# Altium PCB 5mm-6DUT-ECAL.PcbDoc (part 1 of 2)
Units mm, origin at the board's own origin, x right, y up, seen from the top; angles counter-clockwise.
Board outline 62 x 119 mm, 4 copper layers (Top Layer, Mid-Layer 1, Mid-Layer 2, Bottom Layer), stack 1.105 mm thick; 68 components, 63 nets, 769 pads, 1024 vias.
Unrouted connection lines stored in the file: 1.
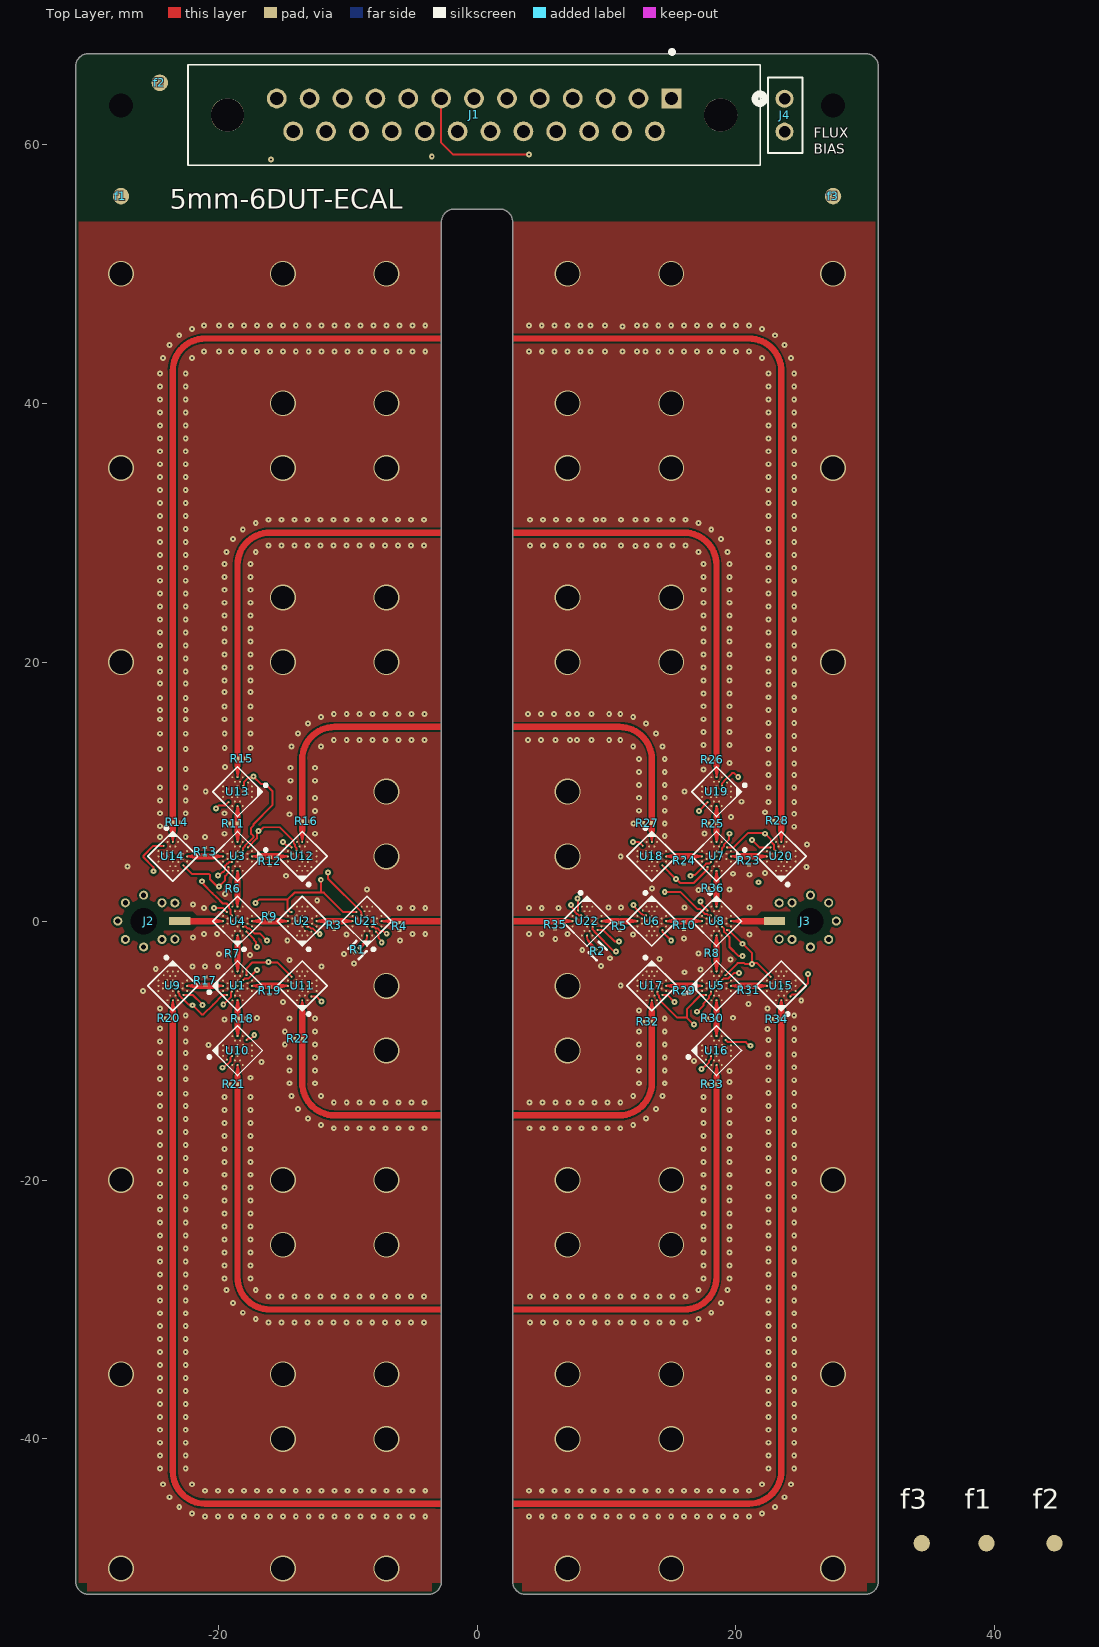
[diagram p0: Top Layer view]
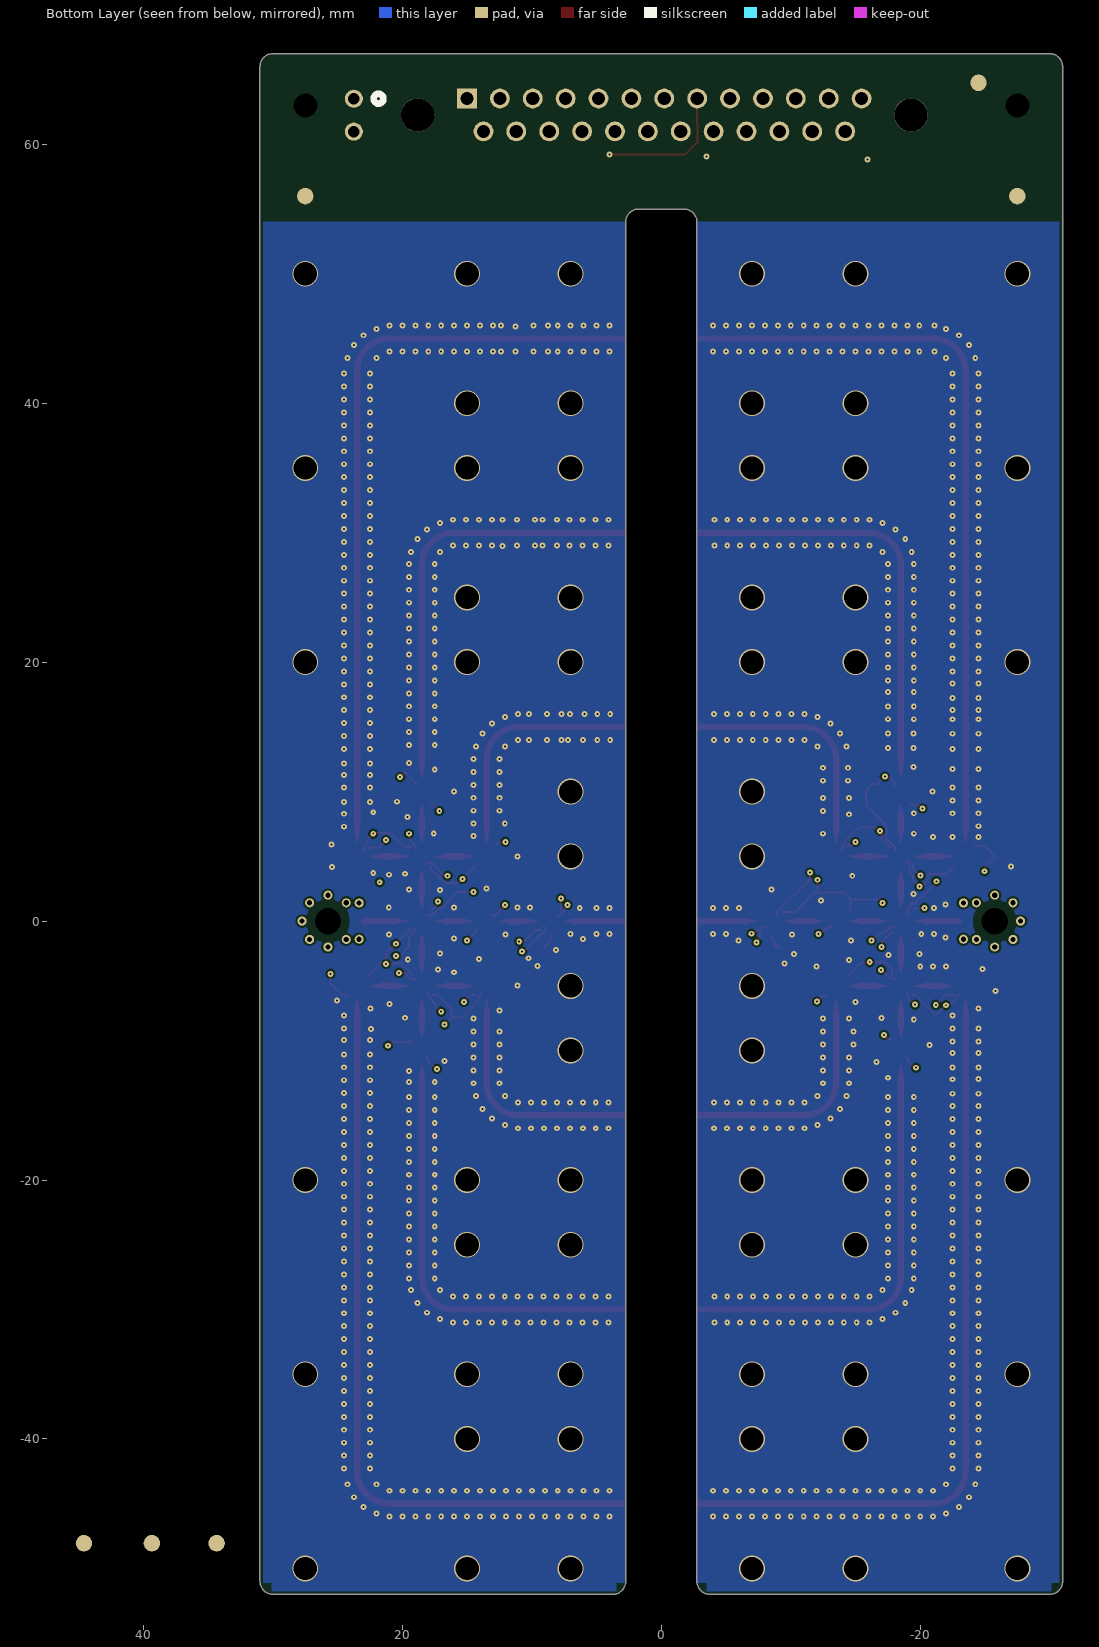
[diagram p1: Bottom Layer view, seen from below]
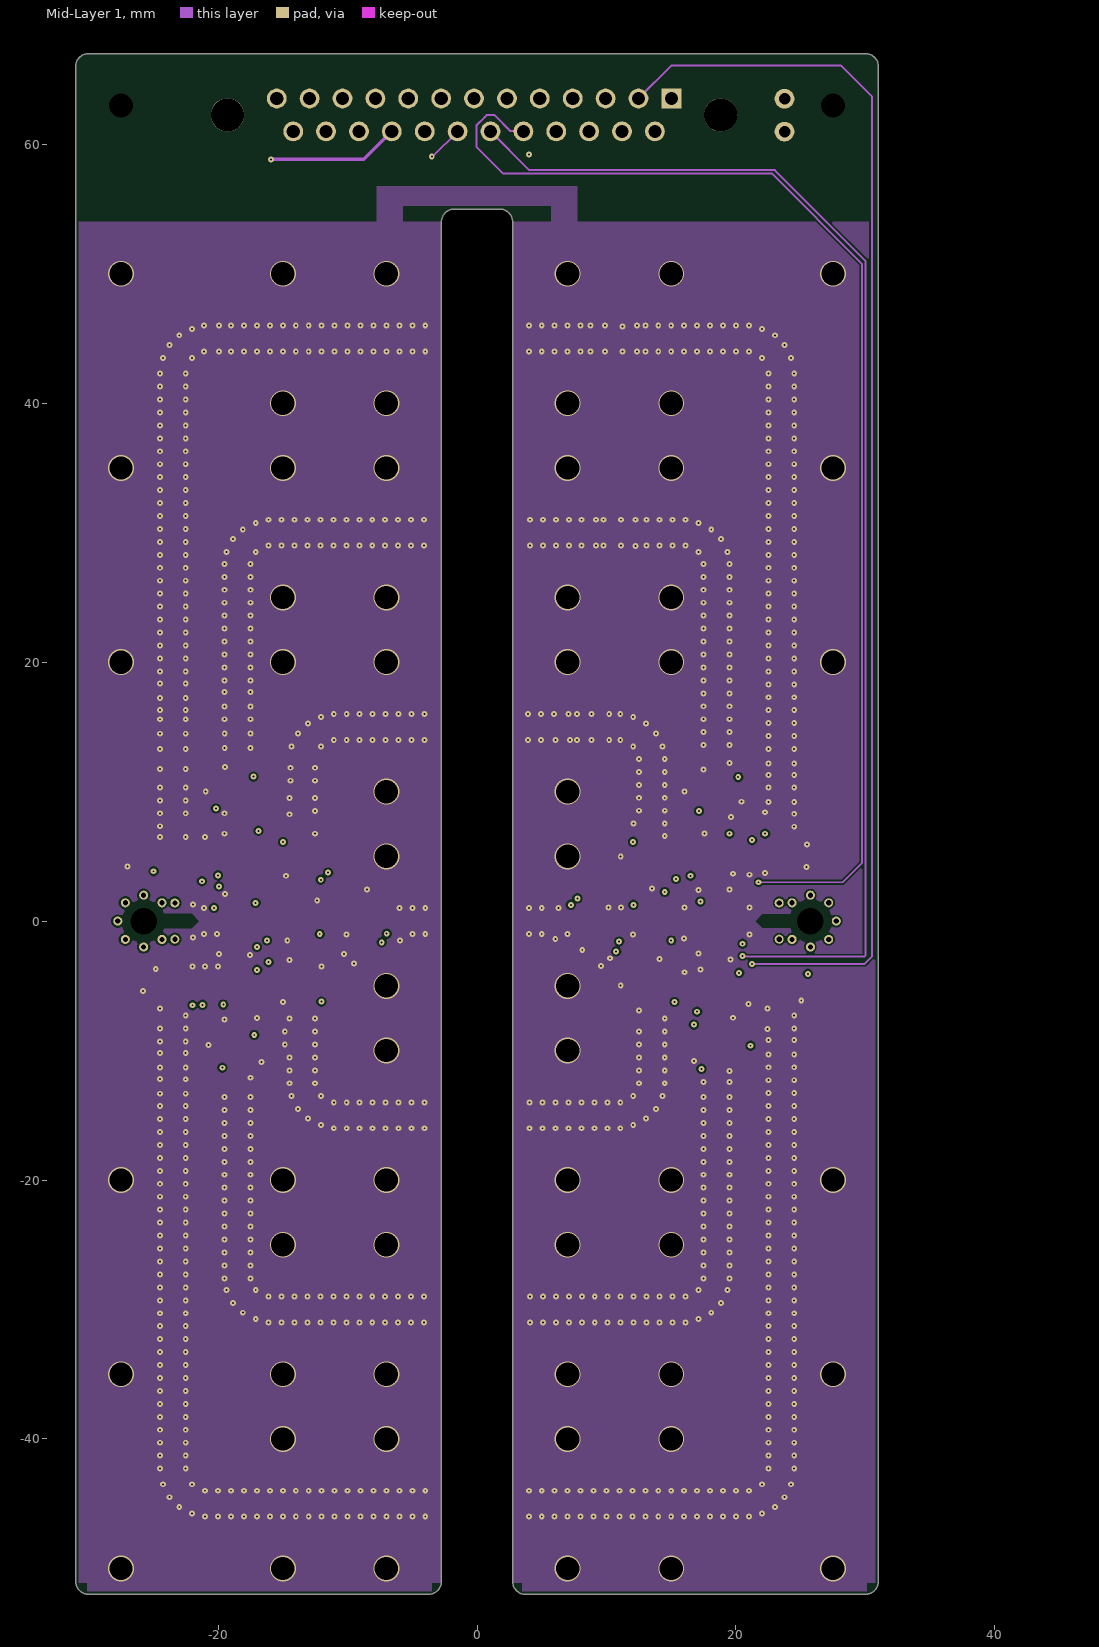
[diagram p2: Mid-Layer 1]
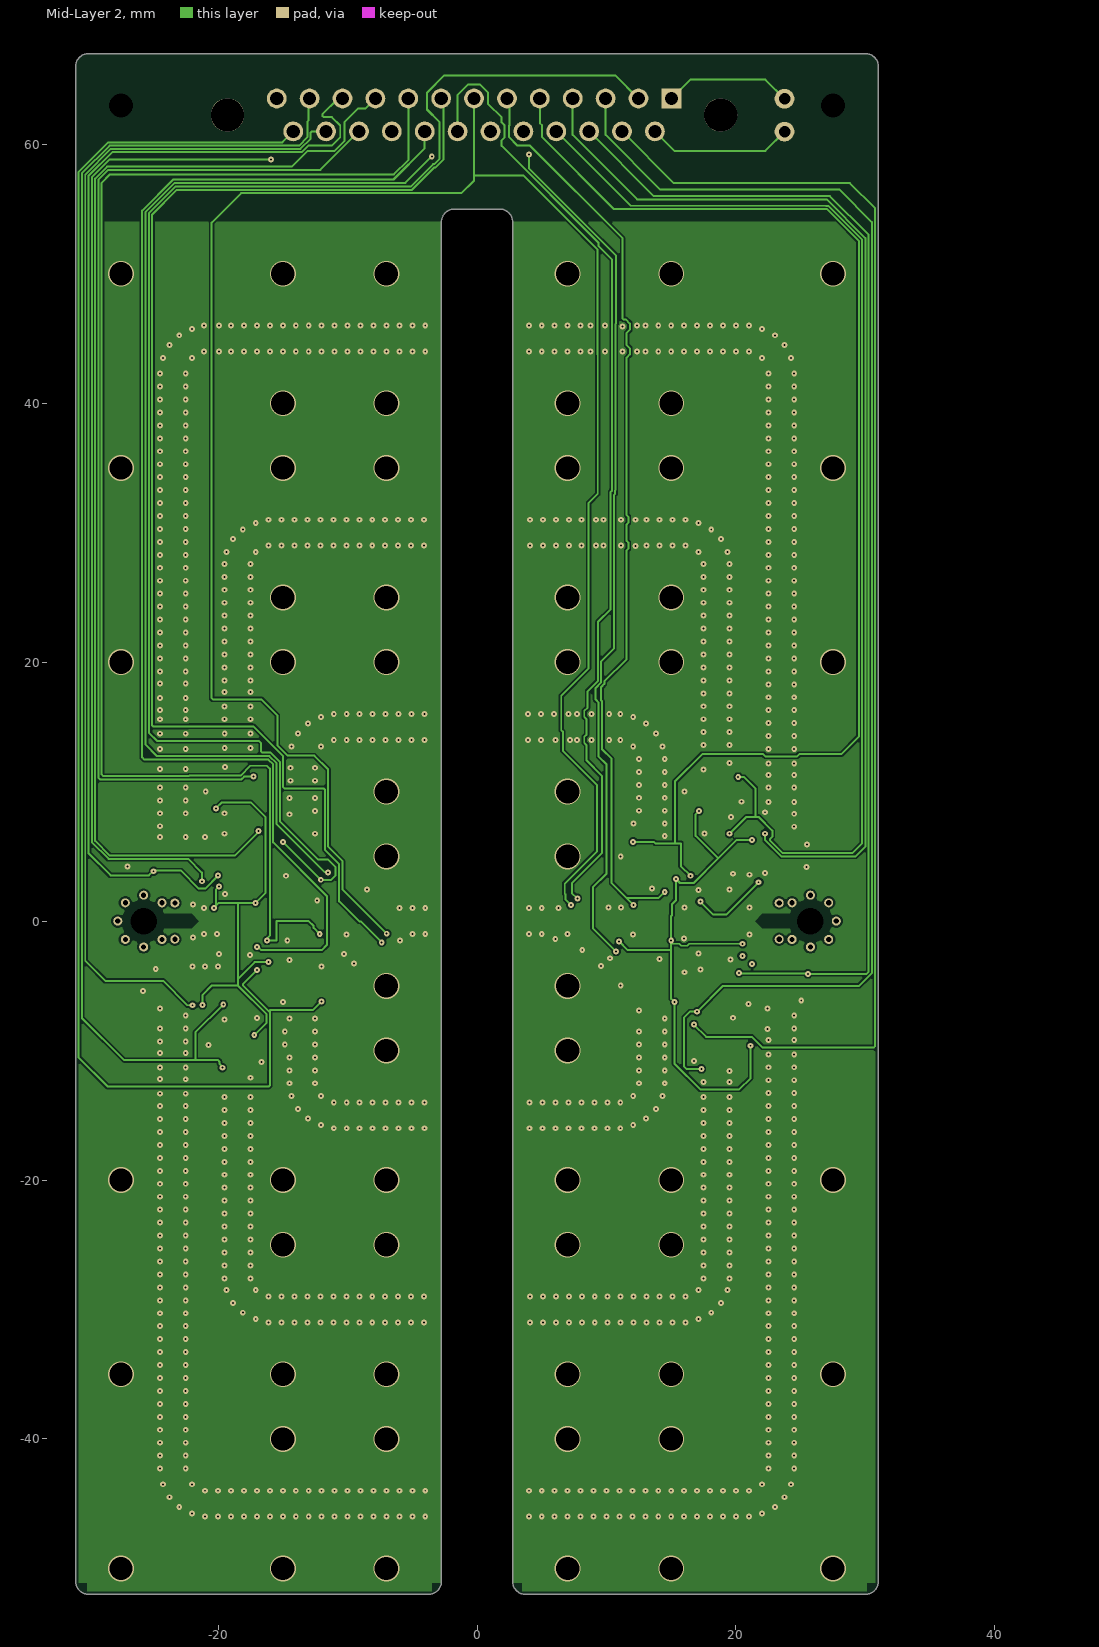
[diagram p3: Mid-Layer 2]

## Layer stack, top to bottom
Top Solder: solder mask 0.0254, SM-001, Dk 4
Top Layer: signal copper 0.035
Core1: dielectric 0.254, RO4350B, Dk 3.48
Mid-Layer 1: signal copper 0.035
Dielectric 1: prepreg 0.1778, PR7628, Dk 4.24
Dielectric 2: prepreg 0.1016, PR2116, Dk 4.17
Dielectric 3: prepreg 0.1778, PR7628, Dk 4.24
Mid-Layer 2: signal copper 0.035
Core2: dielectric 0.254, RO-4350B, Dk 3.48
Bottom Layer: signal copper 0.035
Bottom Solder: solder mask 0.0254, SM-001, Dk 4

## Board outline
-30,-52 -3.75,-52 ccw(c-3.75,-51) -2.75,-51 -2.75,-51.087 -2.75,53.913 -2.75,54 cw(c-1.75,54) -1.75,55 1.75,55 cw(c1.75,54) 2.75,54 2.75,-51 ccw(c3.75,-51) 3.75,-52 30,-52 ccw(c30,-51) 31,-51 31,66 ccw(c30,66) 30,67 -30,67 ccw(c-30,66) -31,66 -31,-51 ccw(c-30,-51)

## Design rules (kind name [scope] priority, off if disabled: settings)
Clearance [All] p1: gap=0.254 ignorepadtopadclearanceinfootprint=FALSE except(0.095: Track-Region SMDPad-Region Region-Region; 0.1: Track-Track Track-SMDPad; 0.102: Track-Fill; 0.152: Arc-SMDPad Arc-THPad Arc-Poly Track-Poly SMDPad-SMDPad SMDPad-Poly THPad-Poly Via-Poly Fill-Poly Poly-Poly Poly-Region Poly-Hole)
HoleSize [All] p1: absolutevalues=TRUE maxlimit=6.35 minlimit=0.025 maxpercent=80.000 minpercent=20.000
MinimumSolderMaskSliver [All] p1 off: minsoldermaskwidth=0.254
PolygonConnect [All] p1: connectstyle=Direct reliefconductorwidth=0.254 reliefentries=4 polygonreliefangle="90 Angle" airgapwidth=0.254
RoutingCorners [All] p1: cornerstyle=45-Degree minsetback=5 maxsetback=5
RoutingVias [All] p1: holewidth=0.381 width=0.635 viastyle="Through Hole" minholewidth=0.127 minwidth=0.254 maxholewidth=0.711 maxwidth=1.27
SilkToSilkClearance [All] p1 off: silktosilkclearance=0.254
SilkToSolderMaskClearance [IsPad] p1 off: minsilkscreentomaskgap=0.254 clearancetoexposedcopper=TRUE
SolderMaskExpansion [All] p1: expansion=0.102 istentingtop=FALSE
Width [All] p1: maxlimit=0.55 minlimit=0.1 preferedwidth=0.152 midlayer1_minwidth=0.102 midlayer1_maxwidth=0.254 midlayer2_minwidth=0.102 midlayer2_maxwidth=0.254 bottomlayer_minwidth=0.102 bottomlayer_maxwidth=0.254 minimp=50.000000 maximp=50.000000 favimp=50.000000
Width cpw-Z-1 [All] p2 off: maxlimit=0.5 minlimit=0.174 preferedwidth=0.254 toplayer_minwidth=0.323 toplayer_prefwidth=0.406 impedanceprofiledriven=TRUE minimp=50.000000 maximp=50.000000 favimp=50.000000
25 further rules are at their usual default settings.

## Classes and differential pairs
component class RIGHT-ISOLATION: R23 R24 R25 R26 R27 R28 R29 R30 R31 R32 R33 R34 U15 U16 U17 U18 U19 U20
component class MICRO-D: f1 f2 f3 J1 J4
component class LEFT-ISOLATION: R11 R12 R13 R14 R15 R16 R17 R18 R19 R20 R21 R22 U9 U10 U11 U12 U13 U14
component class INPUT-OUTPUT: f1 f2 f3 J2 J3 R6 R7 R8 R36 U1 U3 U4 U5 U7 U8
component class ECAL: R1 R2 R3 R4 R5 R9 R10 R35 U2 U6 U21 U22

## Components (designator, comment, footprint, x,y, rotation, side; value= is the part's Value field where it differs from the comment)
f1 "Fiducial" fiducial 39.35,-48.05 r0 top
f1 "Fiducial" fiducial -27.5,56 r0 top
f2 "Fiducial" fiducial 44.6,-48.05 r0 top
f2 "Fiducial" fiducial -24.5,64.75 r0 top
f3 "Fiducial" fiducial 34.35,-48.05 r0 top
f3 "Fiducial" fiducial 27.5,56 r0 top
J1 "M83513/25-D01CP" BEL_M83513/25-D01CP -0.23,62.27 r0 top
J2 "85305-0232" MOLEX_85305-0232 -25.75,0 r90 top
J3 "85305-0232" MOLEX_85305-0232 25.75,0 r270 top
J4 "TSW-102-07-G-S" CON2_1X2_TU_TSW 23.75,62.25 r270 top
R1 "TNPW020150R0BEED" FP-ERJ1GN-IPC_C -9.225,-2.225 r225 top
R2 "TNPW020150R0BEED" FP-ERJ1GN-IPC_C 9.32,-2.32 r315 top
R3 "TE connectivity CPF0201B56K2E1" 0201-resistor -11.025,-0.325 r90 top value=56k
R4 "TE connectivity CPF0201B56K2E1" 0201-resistor -5.975,-0.4 r90 top value=56k
R5 "TE connectivity CPF0201B56K2E1" 0201-resistor 11.025,-0.4 r90 top value=56k
R6 "TE connectivity CPF0201B56K2E1" 0201-resistor -18.825,2.5 r0 top value=56k
R7 "TE connectivity CPF0201B56K2E1" 0201-resistor -18.875,-2.525 r0 top value=56k
R8 "TE connectivity CPF0201B56K2E1" 0201-resistor 18.15,-2.475 r0 top value=56k
R9 "TE connectivity CPF0201B56K2E1" 0201-resistor -16,0.325 r270 top value=56k
R10 "TE connectivity CPF0201B56K2E1" 0201-resistor 16,-0.325 r90 top value=56k
R11 "TE connectivity CPF0201B56K2E1" 0201-resistor -18.825,7.525 r0 top value=56k
R12 "TE connectivity CPF0201B56K2E1" 0201-resistor -16,4.625 r90 top value=56k
R13 "TE connectivity CPF0201B56K2E1" 0201-resistor -21,5.375 r270 top value=56k
R14 "TE connectivity CPF0201B56K2E1" 0201-resistor -23.2,7.625 r180 top value=56k
R15 "TE connectivity CPF0201B56K2E1" 0201-resistor -18.175,12.55 r180 top value=56k
R16 "TE connectivity CPF0201B56K2E1" 0201-resistor -13.175,7.7 r180 top value=56k
R17 "TE connectivity CPF0201B56K2E1" 0201-resistor -20.975,-4.625 r270 top value=56k
R18 "TE connectivity CPF0201B56K2E1" 0201-resistor -18.125,-7.525 r180 top value=56k
R19 "TE connectivity CPF0201B56K2E1" 0201-resistor -16.025,-5.375 r90 top value=56k
R20 "TE connectivity CPF0201B56K2E1" 0201-resistor -23.8,-7.5 r0 top value=56k
R21 "TE connectivity CPF0201B56K2E1" 0201-resistor -18.8,-12.6 r0 top value=56k
R22 "TE connectivity CPF0201B56K2E1" 0201-resistor -13.8,-9.1 r0 top value=56k
R23 "TE connectivity CPF0201B56K2E1" 0201-resistor 21,4.65 r90 top value=56k
R24 "TE connectivity CPF0201B56K2E1" 0201-resistor 16,4.675 r90 top value=56k
R25 "TE connectivity CPF0201B56K2E1" 0201-resistor 18.196,7.525 r0 top value=56k
R26 "TE connectivity CPF0201B56K2E1" 0201-resistor 18.15,12.475 r0 top value=56k
R27 "TE connectivity CPF0201B56K2E1" 0201-resistor 13.15,7.575 r0 top value=56k
R28 "TE connectivity CPF0201B56K2E1" 0201-resistor 23.175,7.75 r0 top value=56k
R29 "TE connectivity CPF0201B56K2E1" 0201-resistor 16,-5.375 r90 top value=56k
R30 "TE connectivity CPF0201B56K2E1" 0201-resistor 18.15,-7.5 r0 top value=56k
R31 "TE connectivity CPF0201B56K2E1" 0201-resistor 20.988,-5.331 r90 top value=56k
R32 "TE connectivity CPF0201B56K2E1" 0201-resistor 13.175,-7.775 r0 top value=56k
R33 "TE connectivity CPF0201B56K2E1" 0201-resistor 18.175,-12.6 r0 top value=56k
R34 "TE connectivity CPF0201B56K2E1" 0201-resistor 23.15,-7.575 r0 top value=56k
R35 "TE connectivity CPF0201B56K2E1" 0201-resistor 6.025,-0.3 r90 top value=56k
R36 "TE connectivity CPF0201B56K2E1" 0201-resistor 18.2,2.525 r0 top value=56k
U1 "MM5130*" MM5130-NORM_PCB_NOFLOOD#1 -18.5,-5 r45 top
U2 "MM5130*" MM5130-NORM_PCB_NOFLOOD#1 -13.5,0 r135 top
U3 "MM5130*" MM5130-NORM_PCB_NOFLOOD#1 -18.5,5 r225 top
U4 "MM5130*" MM5130-NORM_PCB_NOFLOOD#2 -18.5,0 r135 top
U5 "MM5130*" MM5130-NORM_PCB_NOFLOOD#1 18.5,-5 r45 top
U6 "MM5130*" MM5130-NORM_PCB_NOFLOOD#1 13.5,0 r315 top
U7 "MM5130*" MM5130-NORM_PCB_NOFLOOD#1 18.5,5 r225 top
U8 "MM5130*" MM5130-NORM_PCB_NOFLOOD#1 18.5,0 r315 top
U9 "MM5130*" MM5130-NORM_PCB_NOFLOOD#1 -23.5,-5 r315 top
U10 "MM5130*" MM5130-NORM_PCB_NOFLOOD#1 -18.5,-10 r45 top
U11 "MM5130*" MM5130-NORM_PCB_NOFLOOD#1 -13.5,-5 r135 top
U12 "MM5130*" MM5130-NORM_PCB_NOFLOOD#1 -13.5,5 r135 top
U13 "MM5130*" MM5130-NORM_PCB_NOFLOOD#1 -18.5,10 r225 top
U14 "MM5130*" MM5130-NORM_PCB_NOFLOOD#1 -23.5,5 r315 top
U15 "MM5130*" MM5130-NORM_PCB_NOFLOOD#1 23.5,-5 r135 top
U16 "MM5130*" MM5130-NORM_PCB_NOFLOOD#1 18.5,-10 r45 top
U17 "MM5130*" MM5130-NORM_PCB_NOFLOOD#1 13.5,-5 r315 top
U18 "MM5130*" MM5130-NORM_PCB_NOFLOOD#1 13.5,5 r315 top
U19 "MM5130*" MM5130-NORM_PCB_NOFLOOD#1 18.5,10 r225 top
U20 "MM5130*" MM5130-NORM_PCB_NOFLOOD#1 23.5,5 r135 top
U21 "MM5130*" MM5130-NORM_PCB_NOFLOOD#1 -8.5,0 r135 top
U22 "MM5130*" MM5130-NORM_PCB_NOFLOOD#1 8.5,0 r315 top

## Footprints (in the part's own frame and the unit in brackets; to place one, negate y for a bottom-side part, rotate by r counter-clockwise, add the part's x,y. Pads: shape width x height; smd on the part's side, far side on the other; paste and mask are expansions set on the pad)
0201-resistor [mm]
  rect 0.25x0.3 smd: 1(-0.3,0) 2(0.3,0)
BEL_M83513/25-D01CP [mm]
  rect 1.53x1.53 hole 1.02: 1(15.24,1.27)
  round 1.53 hole 1.02: 2(12.7,1.27) 3(10.16,1.27) 4(7.62,1.27) 5(5.08,1.27) 6(2.54,1.27) 7(0,1.27) 8(-2.54,1.27) 9(-5.08,1.27) 10(-7.62,1.27) 11(-10.16,1.27) 12(-12.7,1.27) 13(-15.24,1.27) 14(13.97,-1.27) 15(11.43,-1.27) 16(8.89,-1.27) 17(6.35,-1.27) 18(3.81,-1.27) 19(1.27,-1.27) 20(-1.27,-1.27) 21(-3.81,-1.27) 22(-6.35,-1.27) 23(-8.89,-1.27) 24(-11.43,-1.27) 25(-13.97,-1.27)
  round 2.57 hole 2.57 unplated: ""(-19.05,0) ""(19.05,0)
  silkscreen extent -22.1,-3.88 22.1,5.01, body extent -21.92,-3.79 22.03,4.04, height 14.58
CON2_1X2_TU_TSW [mil]
  round 55 / inner round 60 / far side round 55 hole 35 paste-99999 mask+0: 1(-50,0) 2(50,0)
  silkscreen extent -115,-90 115,55
fiducial [mm]
  round 1.27 / inner round 0 / far side round 1.27 all layers, no hole paste-2539.97 mask+1.27: 1(0,0)
FP-ERJ1GN-IPC_C [mm]
  rect 0.354x0.263 smd paste+0 mask+0: 1(-0.254,0) 2(0.254,0)
  silkscreen extent -0.43,-0.56 0.43,0.56, body extent -0.53,-0.27 0.53,0.27, height 0.25
MM5130-NORM_PCB_NOFLOOD#1 [mm]
  round 0.15 smd mask+0.025: 1(-1.072,0.5) 2(-1.072,0.084) 3(-1.072,-0.5) 4(-0.786,-0.786) 5(-0.5,-1.072) 6(0.5,-1.072) 7(0.786,-0.786) 8(1.072,-0.5) 9(1.072,0.084) 10(1.072,0.5) 11(0.786,0.786) 12(0.5,1.072) 13(-0.5,1.072) 14(-0.786,0.786) 15(-0.681,0.396) 16(-0.615,0) 17(-0.681,-0.396) 18(-0.396,-0.681) 19(0.396,-0.681) 20(0.681,-0.396) 21(0.615,0) 22(0.681,0.396) 23(0.396,0.681) 24(-0.396,0.681) 25(-0.295,0.29) 26(-0.295,-0.29) 27(0.295,-0.29) 28(0.295,0.29) 29(0,0)
  silkscreen extent -1.99,-1.36 1.36,1.36, body extent -1.27,-1.27 1.27,1.27, height 0.98
MM5130-NORM_PCB_NOFLOOD#2 [mm]
  round 0.15 smd mask+0.025: 1(-1.072,0.5) 2(-1.072,0.084) 3(-1.072,-0.5) 4(-0.786,-0.786) 5(-0.5,-1.072) 6(0.5,-1.072) 7(0.786,-0.786) 8(1.072,-0.5) 9(1.072,0.084) 10(1.072,0.5) 11(0.786,0.786) 12(0.5,1.072) 13(-0.5,1.072) 14(-0.786,0.786) 15(-0.681,0.396) 16(-0.615,0) 17(-0.681,-0.396) 18(-0.396,-0.681) 19(0.396,-0.681) 20(0.681,-0.396) 21(0.615,0) 22(0.681,0.396) 23(0.396,0.681) 24(-0.396,0.681) 25(-0.295,0.29) 26(-0.295,-0.29) 27(0.295,-0.29) 28(0.295,0.29) 29(0.003,0.003)
  silkscreen extent -1.99,-1.36 1.36,1.36, body extent -1.27,-1.27 1.27,1.27, height 0.98
MOLEX_85305-0232 [mm]
  rect 0.61x1.651 smd: 1(0,-2.775)
  round 0.7 hole 0.4 mask+0: gnd(-2,0) gnd(-1.414,-1.414) gnd(-1.414,1.414) gnd(-1.4,-2.41) gnd(0,2) gnd(1.4,-2.41) gnd(1.414,-1.414) gnd(1.414,1.414) gnd(2,0)
  body extent -2.5,-3.5 2.5,2.5, height 4.06

## Part data
J1: "MIL-DTL-83513 PCB Mounted Connector", Package=None, Availability=Unavailable, MP=M83513/25-D01CP, Price=None
J2 J3: "SMP Connector Plug, Male Pin 50Ohm Surface Mount Solder", Package=None, Availability="In Stock", Check_prices=https://www.snapeda.com/parts/853050232/Molex/view-part/?ref=eda, MF=Molex, MP=853050232, Price=None, Purchase-URL=https://pricing.snapeda.com/search/part/853050232/?ref=eda, SnapEDA_Link=https://www.snapeda.com/parts/853050232/Molex/view-part/?ref=snap
J4: "No Description Available", Mfr_Name="Samtec Inc", Copyright="Copyright (C) 2024 Ultra Librarian. All rights reserved.", Manufacturer_Part_Number=TSW-102-07-G-S, RefDes=RefDes, Type=DEV
R1 R2: library part CMP-1010-00416-3, "RES SMD 50 OHM 0.1% 1/20W 0201", Case Code (Imperial)=0201, Case Code (Metric)=0603, Max Operating Temperature=125°C, Max Power Dissipation=50mW, Min Operating Temperature=-55°C, Package Quantity=15000, Resistance=1kR, Resistance Tolerance=1%, Resistor Type="Thick Film", Temperature Coefficient=200ppm/°C, Voltage Rating=25V, Case/Package=0201, Contact Plating=Tin, Features="Automotive AEC-Q200", Height=0.01inch, Lead Free="Lead Free", Length=0.6mm, Mount="Surface Mount", Number of Pins=2, Number of Terminations=2, Packaging="Tape and Reel", Power Rating=50mW, Radiation Hardening=No, RoHS Compliant=Yes, Series=ERJ, Size Code=0201, Termination=SMD/SMT, Tolerance=1%, Voltage Rating (DC)=25V, Weight=6E-06oz, Width=0.012inch
R3 R4 R5 R6 R7 R8 R9 R10 R11 R12 R13 R14 R15 R16 R17 R18 R19 R20 R21 R22 R23 R24 R25 R26 R27 R28 R29 R30 R31 R32 R33 R34 R35 R36: "CPF 0201 56K2 0.1% 25PPM 1K RL", Mfgr Part No.=CPF0201B56K2E1, Package=None, Availability=Unavailable, Mfgr="TE connectivity", MP=ERJ1GN0R00C, Price=None
U1 U2 U3 U4 U5 U6 U7 U8 U9 U10 U11 U12 U13 U14 U15 U16 U17 U18 U19 U20 U21 U22: library part IC-MM5130, "High power SP4T MEMs switch"

## Free pads (board coordinates)
  round 1.524 hole 1.854: 9(-27.5,63) 9(27.5,63)
  round 0 hole 2.032 unplated: ""(-25.75,0) ""(25.75,0)

## Via types
v1: diameter 0.457, hole 0.152, Top Layer to Bottom Layer, 964 vias
v2: diameter 2, hole 1.8, Top Layer to Bottom Layer, 60 vias

## Nets (pads, with @x,y where several pads share a name; then routed paths per layer and width w, separated by ;. In a path a pad name is that pad's centre, name@x,y a point inside that pad or via, vN(x,y) a via of type N, cw(c..) or ccw(c..) an arc to the next point about the centre after c; other vN are vias at no path point)
GND: J2.gnd@-27.75,0 R1.2 R2.2 R3.1 R4.1 R5.1 R6.1 R7.1 R8.1 R9.1 R10.1 R11.1 R12.1 R13.1 R14.1 R15.1 R16.1 R17.1 R18.1 R19.1 R20.1 R21.1 R22.1 R23.1 R24.1 R25.1 R26.1 R27.1 R28.1 R29.1 R30.1 R31.1 R32.1 R33.1 R34.1 R35.1 R36.1 U1.1 U1.3 U1.5 U1.6 U1.8 U1.10 U1.12 U1.13 U1.15 U1.17 U1.18 U1.19 U1.20 U1.22 U1.23 U1.24 U1.25 U1.26 U1.27 U1.28 U2.1 U2.2 U2.3 U2.5 U2.6 U2.7 U2.8 U2.10 U2.12 U2.13 U2.14 U2.15 U2.17 U2.18 U2.19 U2.20 U2.21 U2.22 U2.23 U2.24 U2.25 U2.26 U2.27 U2.28 U3.1 U3.3 U3.5 U3.6 U3.8 U3.10 U3.12 U3.13 U3.15 U3.17 U3.18 U3.19 U3.20 U3.22 U3.23 U3.24 U3.25 U3.26 U3.27 U3.28 U4.1 U4.3 U4.5 U4.6 U4.8 U4.10 U4.12 U4.13 U4.15 U4.17 U4.18 U4.19 U4.20 U4.22 U4.23 U4.24 U4.25 U4.26 U4.27 U4.28 U5.1 U5.3 U5.5 U5.6 U5.8 U5.10 U5.12 U5.13 U5.15 U5.17 U5.18 U5.19 U5.20 U5.22 U5.23 U5.24 U5.25 U5.26 U5.27 U5.28 U6.1 U6.2 U6.3 U6.5 U6.6 U6.7 U6.8 U6.10 U6.12 U6.13 U6.14 U6.15 U6.17 U6.18 U6.19 U6.20 U6.21 U6.22 U6.23 U6.24 U6.25 U6.26 U6.27 U6.28 U7.1 U7.3 U7.5 U7.6 U7.8 U7.10 U7.12 U7.13 U7.15 U7.17 U7.18 U7.19 U7.20 U7.22 U7.23 U7.24 U7.25 U7.26 U7.27 U7.28 U8.1 U8.3 U8.5 U8.6 U8.8 U8.10 U8.12 U8.13 U8.15 U8.17 U8.18 U8.19 U8.20 U8.22 U8.23 U8.24 U8.25 U8.26 U8.27 U8.28 U9.1 U9.2 U9.3 U9.4 U9.5 U9.6 U9.8 U9.10 U9.12 U9.13 U9.14 U9.15 U9.16 U9.17 U9.18 U9.19 U9.20 U9.22 U9.23 U9.24 U9.25 U9.26 U9.27 U9.28 U10.1 U10.2 U10.3 U10.5 U10.6 U10.7 U10.8 U10.10 U10.12 U10.13 U10.14 U10.15 U10.17 U10.18 U10.19 U10.20 U10.21 U10.22 U10.23 U10.24 U10.25 U10.26 U10.27 U10.28 U11.1 U11.3 U11.4 U11.5 U11.6 U11.7 U11.8 U11.10 U11.12 U11.13 U11.15 U11.16 U11.17 U11.18 U11.19 U11.20 U11.21 U11.22 U11.23 U11.24 U11.25 U11.26 U11.27 U11.28 U12.1 U12.2 U12.3 U12.4 U12.5 U12.6 U12.8 U12.10 U12.12 U12.13 U12.14 U12.15 U12.16 U12.17 U12.18 U12.19 U12.20 U12.22 U12.23 U12.24 U12.25 U12.26 U12.27 U12.28 U13.1 U13.2 U13.3 U13.5 U13.6 U13.7 U13.8 U13.10 U13.12 U13.13 U13.14 U13.15 U13.17 U13.18 U13.19 U13.20 U13.21 U13.22 U13.23 U13.24 U13.25 U13.26 U13.27 U13.28 U14.1 U14.3 U14.4 U14.5 U14.6 U14.7 U14.8 U14.10 U14.12 U14.13 U14.15 U14.16 U14.17 U14.18 U14.19 U14.20 U14.21 U14.22 U14.23 U14.24 U14.25 U14.26 U14.27 U14.28 U15.1 U15.3 U15.4 U15.5 U15.6 U15.7 U15.8 U15.10 U15.12 U15.13 U15.15 U15.16 U15.17 U15.18 U15.19 U15.20 U15.21 U15.22 U15.23 U15.24 U15.25 U15.26 U15.27 U15.28 U16.1 U16.2 U16.3 U16.5 U16.6 U16.7 U16.8 U16.10 U16.12 U16.13 U16.14 U16.15 U16.17 U16.18 U16.19 U16.20 U16.21 U16.22 U16.23 U16.24 U16.25 U16.26 U16.27 U16.28 U17.1 U17.2 U17.3 U17.4 U17.5 U17.6 U17.8 U17.10 U17.12 U17.13 U17.14 U17.15 U17.16 U17.17 U17.18 U17.19 U17.20 U17.22 U17.23 U17.24 U17.25 U17.26 U17.27 U17.28 U18.1 U18.3 U18.4 U18.5 U18.6 U18.7 U18.8 U18.10 U18.12 U18.13 U18.15 U18.16 U18.17 U18.18 U18.19 U18.20 U18.21 U18.22 U18.23 U18.24 U18.25 U18.26 U18.27 U18.28 U19.1 U19.2 U19.3 U19.5 U19.6 U19.7 U19.8 U19.10 U19.12 U19.13 U19.14 U19.15 U19.17 U19.18 U19.19 U19.20 U19.21 U19.22 U19.23 U19.24 U19.25 U19.26 U19.27 U19.28 U20.1 U20.2 U20.3 U20.4 U20.5 U20.6 U20.8 U20.10 U20.12 U20.13 U20.14 U20.15 U20.16 U20.17 U20.18 U20.19 U20.20 U20.22 U20.23 U20.24 U20.25 U20.26 U20.27 U20.28 U21.1 U21.3 U21.5 U21.6 U21.7 U21.8 U21.10 U21.12 U21.13 U21.15 U21.17 U21.18 U21.19 U21.20 U21.22 U21.23 U21.24 U21.25 U21.26 U21.27 U21.28 U22.1 U22.3 U22.5 U22.6 U22.8 U22.10 U22.12 U22.13 U22.14 U22.15 U22.17 U22.18 U22.19 U22.20 U22.22 U22.23 U22.24 U22.25 U22.26 U22.27 U22.28
  other v1: -21,-46 -20,-46 -19,-46 -18,-46 -17,-46 -16,-46 -15,-46 -14,-46 -13,-46 -12,-46 -11,-46 -10,-46 -9,-46 -8,-46 -7,-46 -6,-46 -5,-46 -4,-46 4,-46 5,-46 6,-46 7,-46 8,-46 9,-46 10,-46 11,-46 12,-46 13,-46 14,-46 15,-46 16,-46 17,-46 18,-46 19,-46 20,-46 21,-46 -22,-45.75 22,-45.75 -23,-45.25 23,-45.25 -23.75,-44.5 23.75,-44.5 -21,-44 -20,-44 -19,-44 -18,-44 -17,-44 -16,-44 -15,-44 -14,-44 -13,-44 -12,-44 -11,-44 -10,-44 -9,-44 -8,-44 -7,-44 -6,-44 -5,-44 -4,-44 4,-44 5,-44 6,-44 7,-44 8,-44 9,-44 10,-44 11,-44 12,-44 13,-44 14,-44 15,-44 16,-44 17,-44 18,-44 19,-44 20,-44 21,-44 -24.25,-43.5 -22,-43.5 22,-43.5 24.25,-43.5 -24.5,-42.29 -22.5,-42.29 22.5,-42.29 24.5,-42.29 -24.5,-41.29 -22.5,-41.29 22.5,-41.29 24.5,-41.29 -24.5,-40.29 -22.5,-40.29 22.5,-40.29 24.5,-40.29 -24.5,-39.29 -22.5,-39.29 22.5,-39.29 24.5,-39.29 -24.5,-38.29 -22.5,-38.29 22.5,-38.29 24.5,-38.29 -24.5,-37.29 -22.5,-37.29 22.5,-37.29 24.5,-37.29 -24.5,-36.29 -22.5,-36.29 22.5,-36.29 24.5,-36.29 -24.5,-35.29 -22.5,-35.29 22.5,-35.29 24.5,-35.29 -24.5,-34.29 -22.5,-34.29 22.5,-34.29 24.5,-34.29 -24.5,-33.29 -22.5,-33.29 22.5,-33.29 24.5,-33.29 -24.5,-32.29 -22.5,-32.29 22.5,-32.29 24.5,-32.29 -24.5,-31.29 -22.5,-31.29 22.5,-31.29 24.5,-31.29 -16.093,-31 -15.093,-31 -14.093,-31 -13.093,-31 -12.093,-31 -11.093,-31 -10.093,-31 -9.093,-31 -8.093,-31 -7.093,-31 -6.093,-31 -5.093,-31 -4.093,-31 4.093,-31 5.093,-31 6.093,-31 7.093,-31 8.093,-31 9.093,-31 10.093,-31 11.093,-31 12.093,-31 13.093,-31 14.093,-31 15.093,-31 16.093,-31 -17.093,-30.75 17.093,-30.75 -24.5,-30.29 -22.5,-30.29 22.5,-30.29 24.5,-30.29 -18.093,-30.25 18.093,-30.25 -18.843,-29.5 18.843,-29.5 -24.5,-29.29 -22.5,-29.29 22.5,-29.29 24.5,-29.29 -16.093,-29 -15.093,-29 -14.093,-29 -13.093,-29 -12.093,-29 -11.093,-29 -10.093,-29 -9.093,-29 -8.093,-29 -7.093,-29 -6.093,-29 -5.093,-29 -4.093,-29 4.093,-29 5.093,-29 6.093,-29 7.093,-29 8.093,-29 9.093,-29 10.093,-29 11.093,-29 12.093,-29 13.093,-29 14.093,-29 15.093,-29 16.093,-29 -19.343,-28.5 -17.093,-28.5 17.093,-28.5 19.343,-28.5 -24.5,-28.29 -22.5,-28.29 22.5,-28.29 24.5,-28.29 -19.5,-27.593 -17.5,-27.593 17.5,-27.593 19.5,-27.593 -24.5,-27.29 -22.5,-27.29 22.5,-27.29 24.5,-27.29 -19.5,-26.593 -17.5,-26.593 17.5,-26.593 19.5,-26.593 -24.5,-26.29 -22.5,-26.29 22.5,-26.29 24.5,-26.29 -19.5,-25.593 -17.5,-25.593 17.5,-25.593 19.5,-25.593 -24.5,-25.29 -22.5,-25.29 22.5,-25.29 24.5,-25.29 -19.5,-24.593 -17.5,-24.593 17.5,-24.593 19.5,-24.593 -24.5,-24.29 -22.5,-24.29 22.5,-24.29 24.5,-24.29 -19.5,-23.593 -17.5,-23.593 17.5,-23.593 19.5,-23.593 -24.5,-23.29 -22.5,-23.29 22.5,-23.29 24.5,-23.29 -19.5,-22.593 -17.5,-22.593 17.5,-22.593 19.5,-22.593 -24.5,-22.29 -22.5,-22.29 22.5,-22.29 24.5,-22.29 -19.5,-21.593 -17.5,-21.593 17.5,-21.593 19.5,-21.593 -24.5,-21.29 -22.5,-21.29 22.5,-21.29 24.5,-21.29 -19.5,-20.593 -17.5,-20.593 17.5,-20.593 19.5,-20.593 -24.5,-20.29 -22.5,-20.29 22.5,-20.29 24.5,-20.29 -19.5,-19.593 -17.5,-19.593 17.5,-19.593 19.5,-19.593 -24.5,-19.29 -22.5,-19.29 22.5,-19.29 24.5,-19.29 -19.5,-18.593 -17.5,-18.593 17.5,-18.593 19.5,-18.593 -24.5,-18.29 -22.5,-18.29 22.5,-18.29 24.5,-18.29 -19.5,-17.593 -17.5,-17.593 17.5,-17.593 19.5,-17.593 -24.5,-17.29 -22.5,-17.29 22.5,-17.29 24.5,-17.29 -19.5,-16.593 -17.5,-16.593 17.5,-16.593 19.5,-16.593 -24.5,-16.29 -22.5,-16.29 22.5,-16.29 24.5,-16.29 -11.065,-16 -10.065,-16 -9.065,-16 -8.065,-16 -7.065,-16 -6.065,-16 -5.065,-16 -4.065,-16 4.065,-16 5.065,-16 6.065,-16 7.065,-16 8.065,-16 9.065,-16 10.065,-16 11.065,-16 -12.065,-15.75 12.065,-15.75 -19.5,-15.593 -17.5,-15.593 17.5,-15.593 19.5,-15.593 -24.5,-15.29 -22.5,-15.29 22.5,-15.29 24.5,-15.29 -13.065,-15.25 13.065,-15.25 -19.5,-14.593 -17.5,-14.593 17.5,-14.593 19.5,-14.593 -13.815,-14.5 13.815,-14.5 -24.5,-14.29 -22.5,-14.29 22.5,-14.29 24.5,-14.29 -11.065,-14 -10.065,-14 -9.065,-14 -8.065,-14 -7.065,-14 -6.065,-14 -5.065,-14 -4.065,-14 4.065,-14 5.065,-14 6.065,-14 7.065,-14 8.065,-14 9.065,-14 10.065,-14 11.065,-14 -19.5,-13.593 -17.5,-13.593 17.5,-13.593 19.5,-13.593 -14.315,-13.5 -12.065,-13.5 12.065,-13.5 14.315,-13.5 -24.5,-13.334 -22.5,-13.334 22.5,-13.29 24.5,-13.29 -14.5,-12.525 -12.5,-12.525 12.5,-12.525 14.5,-12.525 17.5,-12.441 19.5,-12.441 22.5,-12.29 24.5,-12.29 -24.5,-12.2 -22.5,-12.216 -17.5,-12.1 19.5,-11.593 -14.5,-11.525 -12.5,-11.525 12.5,-11.525 14.5,-11.525 -24.5,-11.303 -22.5,-11.303 22.5,-11.29 24.5,-11.29 -16.637,-10.871 16.75,-10.81 -14.5,-10.525 -12.5,-10.525 12.5,-10.525 14.5,-10.525 22.5,-10.309 24.5,-10.309 -24.5,-10.185 -22.5,-10.185 -20.726,-9.576 -14.85,-9.525 -12.5,-9.525 12.5,-9.525 14.5,-9.525 -24.5,-9.29 -22.5,-9.29 22.5,-9.191 24.5,-9.191 -14.85,-8.525 -12.5,-8.525 12.5,-8.525 14.5,-8.525 22.425,-8.325 -24.5,-8.29 -22.5,-8.29 24.5,-8.29 -19.5,-7.593 -14.5,-7.525 -12.5,-7.525 14.5,-7.525 -17,-7.5 19.787,-7.468 -22.5,-7.29 24.5,-7.29 12.5,-6.9 -24.5,-6.75 22.45,-6.75 20.98,-6.401 -15,-6.25 25.044,-6.147 -25.806,-5.385 11.1,-4.978 16.022,-3.95 17.247,-3.734 -24.816,-3.708 -21.975,-3.5 -21,-3.5 -20,-3.5 -12,-3.5 9.576,-3.454 -9.5,-3.277 -14.5,-3 19.583,-2.972 14.097,-2.921 10.262,-2.87 -17.538,-2.611 -19.928,-2.537 -10.262,-2.54 17.094,-2.489 8.128,-2.235 -5.95,-1.5 -14.656,-1.499 6.045,-1.397 16.002,-1.346 -21.94,-1.27 -10.081,-1.05 12.04,-1.05 21.05,-1.05 -5,-1 -4,-1 4,-1 5,-1 7,-1 -21.078,-0.989 -20.078,-0.989 -21.078,1 -6,1 -5,1 -4,1 4,1 5,1 6.3,1 10.14,1.05 11.122,1.05 16.025,1.05 21.05,1.05 -21.94,1.27 -12.344,1.6 -19.482,2.108 17.1,2.4 -8.509,2.438 19.496,2.45 13.513,2.515 -14.75,3.5 21.031,3.581 19.787,3.658 22.25,3.708 25.451,4.191 -27,4.216 11.1,5.004 25.476,5.918 -24.5,6.5 -22.5,6.5 -21,6.5 14.5,6.575 -19.5,6.75 -12.5,6.75 17.577,6.756 24.5,7.29 -24.489,7.328 14.5,7.525 12.09,7.544 19.609,8.026 -14.5,8.25 24.5,8.29 -24.489,8.328 -22.5,8.328 -19.5,8.328 22.25,8.407 -12.5,8.5 12.5,8.525 14.5,8.525 22.5,9.191 24.5,9.191 20.422,9.22 -24.489,9.328 -22.5,9.328 -14.5,9.5 -12.5,9.5 12.5,9.525 14.5,9.525 -20.955,10.008 16.027,10.008 22.5,10.309 24.5,10.309 -24.489,10.328 -22.5,10.328 12.5,10.525 14.5,10.525 -14.411,10.843 -12.5,10.843 22.5,11.29 24.5,11.29 12.5,11.525 14.5,11.525 17.5,11.7 -24.489,11.75 -22.5,11.75 -14.411,11.843 -12.5,11.843 -19.475,11.916 22.5,12.172 24.5,12.172 19.5,12.2 12.5,12.525 14.5,12.525 -24.489,13.309 -22.5,13.309 22.5,13.29 24.5,13.29 -19.489,13.358 -17.5,13.358 -14.315,13.5 -12.065,13.5 12.065,13.5 14.315,13.5 17.5,13.593 19.5,13.593 -11.065,14 -10.065,14 -9.065,14 -8.065,14 -7.065,14 -6.065,14 -5.065,14 -4.065,14 3.947,14 4.947,14 6.065,14 7.193,14 7.724,14 8.841,14 10.211,14 11.065,14 22.5,14.29 24.5,14.29 -24.489,14.473 -22.5,14.473 -19.489,14.475 -17.5,14.475 -13.815,14.5 13.815,14.5 17.5,14.593 19.5,14.593 -13.065,15.25 13.065,15.25 22.5,15.29 24.5,15.29 -24.489,15.591 -22.5,15.591 -19.5,15.593 -17.5,15.593 17.5,15.593 19.5,15.593 -12.065,15.75 12.065,15.75 -11.065,16 -10.065,16 -9.065,16 -8.065,16 -7.065,16 -6.065,16 -5.065,16 -4.065,16 3.947,16 4.947,16 5.947,16 7.065,16 7.724,16 8.841,16 10.211,16 11.065,16 -24.489,16.29 -22.5,16.29 22.5,16.29 24.5,16.29 -19.5,16.566 -17.5,16.566 17.5,16.593 19.5,16.593 -24.489,17.241 -22.5,17.241 22.5,17.29 24.5,17.29 17.5,17.593 19.5,17.593 -19.5,17.684 -17.5,17.684 22.5,18.29 24.5,18.29 -24.489,18.359 -22.5,18.359 -19.5,18.593 -17.5,18.593 17.5,18.593 19.5,18.593 -24.489,19.29 -22.5,19.29 22.5,19.29 24.5,19.29 -19.5,19.593 -17.5,19.593 17.5,19.593 19.5,19.593 -24.489,20.29 -22.5,20.29 22.5,20.29 24.5,20.29 -19.5,20.593 -17.5,20.593 17.5,20.593 19.5,20.593 -24.489,21.29 -22.5,21.29 22.5,21.29 24.5,21.29 -19.5,21.593 -17.5,21.593 17.5,21.593 19.5,21.593 -24.489,22.29 -22.5,22.29 22.5,22.29 24.5,22.29 -19.5,22.593 -17.5,22.593 17.5,22.593 19.5,22.593 -24.489,23.29 -22.5,23.29 22.5,23.29 24.5,23.29 -19.5,23.593 -17.5,23.593 17.5,23.593 19.5,23.593 -24.489,24.29 -22.5,24.29 22.5,24.29 24.5,24.29 -19.5,24.593 -17.5,24.593 17.5,24.593 19.5,24.593 -24.489,25.29 -22.5,25.29 22.5,25.29 24.5,25.29 -19.5,25.593 -17.5,25.593 17.5,25.593 19.5,25.593 -24.489,26.29 -22.5,26.29 22.5,26.29 24.5,26.29 -19.5,26.593 -17.5,26.593 17.5,26.593 19.5,26.593 -24.5,27.29 -22.5,27.29 22.5,27.29 24.5,27.29 -19.5,27.593 -17.5,27.593 17.5,27.593 19.5,27.593 -24.5,28.29 -22.5,28.29 22.5,28.29 24.5,28.29 -19.343,28.5 -17.093,28.5 17.093,28.5 19.343,28.5 12.251,28.975 -16.093,29 -15.093,29 -14.093,29 -13.093,29 -12.093,29 -11.093,29 -10.093,29 -9.093,29 -8.093,29 -7.093,29 -6.093,29 -5.093,29 -4.093,29 4.093,29 5.093,29 6.093,29 7.093,29 8.066,29 9.184,29 9.764,29 11.134,29 13.093,29 14.093,29 15.093,29 16.093,29 -24.5,29.29 -22.5,29.29 22.5,29.29 24.5,29.29 -18.843,29.5 18.843,29.5 -18.093,30.25 18.093,30.25 -24.5,30.29 -22.5,30.29 22.5,30.29 24.5,30.29 -17.093,30.75 17.093,30.75 -16.093,31 -15.093,31 -14.093,31 -13.093,31 -12.093,31 -11.093,31 -10.093,31 -9.093,31 -8.093,31 -7.093,31 -6.093,31 -5.093,31 -4.093,31 4.093,31 5.093,31 6.093,31 7.093,31 8.066,31 9.184,31 9.764,31 11.134,31 12.251,31 13.093,31 14.093,31 15.093,31 16.093,31 -24.5,31.29 -22.5,31.29 22.5,31.29 24.5,31.29 -24.5,32.29 -22.5,32.29 22.5,32.29 24.5,32.29 -24.5,33.29 -22.5,33.29 22.5,33.29 24.5,33.29 -24.5,34.29 -22.5,34.29 22.5,34.29 24.5,34.29 -24.5,35.29 -22.5,35.29 22.5,35.29 24.5,35.29 -24.5,36.29 -22.5,36.29 22.5,36.29 24.5,36.29 -24.5,37.29 -22.5,37.29 22.5,37.29 24.5,37.29 -24.5,38.29 -22.5,38.29 22.5,38.29 24.5,38.29 -24.5,39.29 -22.5,39.29 22.5,39.29 24.5,39.29 -24.5,40.29 -22.5,40.29 22.5,40.29 24.5,40.29 -24.5,41.29 -22.5,41.29 22.5,41.29 24.5,41.29 -24.5,42.29 -22.5,42.29 22.5,42.29 24.5,42.29 -24.25,43.5 -22,43.5 22,43.5 24.25,43.5 -21.1,44 -19.925,44 -19,44 -18,44 -17,44 -16,44 -15,44 -14,44 -13,44 -12,44 -11,44 -10,44 -9,44 -8,44 -7,44 -6,44 -5,44 -4,44 4,44 5,44 6,44 7,44 8,44 8.765,44 9.882,44 11.252,44 12.37,44 13,44 14,44 15,44 16,44 17,44 18,44 19,44 20,44 21,44 -23.75,44.5 23.75,44.5 -23,45.25 23,45.25 -22,45.75 22,45.75 11.252,45.921 -21.1,46 -19.925,46 -19,46 -18,46 -17,46 -16,46 -15,46 -14,46 -13,46 -12,46 -11,46 -10,46 -9,46 -8,46 -7,46 -6,46 -5,46 -4,46 4,46 5,46 6,46 7,46 8,46 8.765,46 9.882,46 12.37,46 13,46 14,46 15,46 16,46 17,46 18,46 19,46 20,46 21,46
  other v2: -27.5,-50 -15,-50 -7,-50 7,-50 15,-50 27.5,-50 -15,-40 -7,-40 7,-40 15,-40 -27.5,-35 -15,-35 -7,-35 7,-35 15,-35 27.5,-35 -15,-25 -7,-25 7,-25 15,-25 -27.5,-20 -15,-20 -7,-20 7,-20 15,-20 27.5,-20 -7,-10 7,-10 -7,-5 7,-5 -7,5 7,5 -7,10 7,10 -27.5,20 -15,20 -7,20 7,20 15,20 27.5,20 -15,25 -7,25 7,25 15,25 -27.5,35 -15,35 -7,35 7,35 15,35 27.5,35 -15,40 -7,40 7,40 15,40 -27.5,50 -15,50 -7,50 7,50 15,50 27.5,50
NetJ1_1: J1.1 J4.1 | length 10
  Mid-Layer 2 w0.152: J1.1@15.01,63.54 16.47,65 22.27,65 J4.1@23.75,63.52
NetJ1_2: J1.2 U1.9 U2.9 U3.9 U4.9 U5.9 U6.9 U7.9 U8.9 U9.9 U10.9 U11.9 U12.9 U13.9 U14.9 U15.9 U16.9 U17.9 U18.9 U19.9 U20.9 U21.9 U22.9 | length 339.8
  Top Layer w0.152: U9.9@-22.683,-5.699 -21.976,-5.699 v1(-21.2,-6.475) ; U14.9@-22.683,4.301 -22.034,3.653 -20.714,3.653 -20.625,3.564 -20.625,3.235 -20.063,2.673 v1(-19.937,2.673) -19.45,3.16 -19.45,3.475 -19.199,3.726 U3.9@-19.199,4.183 ; v1(-20.325,1.025) -19.644,1.025 U4.9@-19.317,0.699 ; v1(-20.175,8.7) -19.934,8.941 -19.44,8.941 U13.9@-19.199,9.183 ; U10.9@-17.801,-9.183 -17.693,-9.074 -17.481,-9.074 v1(-17.207,-8.8) ; U1.9@-17.801,-4.183 -17.801,-3.651 -17.341,-3.191 -15.428,-3.191 U11.9@-14.317,-4.301 ; v1(-17.1,1.4) -16.825,1.675 -14.625,1.675 ; v1(-14.984,6.106) -14.71,5.833 -14.451,5.833 U12.9@-14.317,5.699 ; -14.417,0.699 -14.625,0.906 -14.625,1.675 ; v1(-12.068,3.191) -12.068,2.2 ; U21.9@-9.32,0.7 -10.325,0.7 -11.825,2.2 -12.068,2.2 ; U22.9@9.317,-0.699 9.749,-0.699 10.625,-1.575 v1(10.975,-1.575) ; U17.9@14.317,-5.699 14.699,-5.699 v1(15.25,-6.25) ; U6.9@14.317,-0.699 14.317,-0.817 v1(15,-1.5) ; U18.9@14.317,4.301 v1(15.369,3.25) 15.398,3.25 15.707,2.941 16.731,2.941 17.801,4.011 U7.9@17.801,4.183 ; v1(17.15,8.5) 17.15,8.531 U19.9@17.801,9.183 ; U16.9@19.199,-9.183 19.36,-9.344 20.762,-9.344 21.046,-9.628 v1(21.125,-9.628) ; U5.9@19.199,-4.183 20.131,-3.25 20.62,-3.25 20.679,-3.309 v1(21.25,-3.309) ; U8.9@19.317,-0.699 19.449,-0.699 v1@20.5,-1.75 ; v1(20.509,-1.751) 21.25,-2.493 21.25,-3.25 21.631,-3.25 U15.9@22.683,-4.301 ; v1(21.25,6.25) 21.801,5.699 U20.9@22.683,5.699 ; -14.625,1.675 -14.1,2.2 -12.068,2.2
  Mid-Layer 1 w0.152: J1.2@12.47,63.54 15.03,66.1 28.1,66.1 30.5,63.7 30.5,-2.75 29.941,-3.309 v1(21.25,-3.309)
  Mid-Layer 2 w0.152: v1(-21.2,-6.475) -21.2,-5.7 -20.475,-4.975 -18.475,-4.975 ; v1(-20.325,1.025) -20.312,1.025 v1@-20.168,1.169 ; v1(-20.175,8.7) -19.7,9.175 -17.475,9.175 -16.325,8.025 -16.325,2.175 v1(-17.1,1.4) -18.475,1.4 ; v1(-19.937,2.673) -19.937,2.662 -20.168,2.431 v1@-20.168,1.169 ; v1(-17.207,-8.8) -16.25,-7.843 -16.25,-7.2 -18.475,-4.975 ; v1(-16.1,-3.175) -17.175,-3.175 -18.475,-4.475 ; v1(-14.984,6.106) v1(-12.068,3.191) -11.269,3.191 -10.941,3.519 -10.941,4.191 -11.5,4.75 -12.25,4.75 -15.227,7.727 -15.227,12.295 -15.937,13.005 -16.586,13.005 -16.675,13.094 -16.675,13.743 -16.848,13.916 -19.72,13.916 -19.722,13.914 -24.72,13.914 -25.35,14.544 -25.35,54.682 -23.302,56.73 -5.127,56.73 -3.391,58.466 -3.309,58.466 -2.913,58.862 -2.913,61.738 -3.865,62.69 -3.865,63.994 -2.534,65.325 10.685,65.325 J1.2@12.47,63.54 ; v1(10.975,-1.575) 11.65,-2.25 15,-2.25 ; v1(17.15,8.5) 16.891,8.241 16.891,6.584 18.633,4.842 ; v1(20.509,-1.751) 16.388,-1.75 16.233,-1.905 15.771,-1.905 15.616,-1.75 15,-1.75 ; v1(21.125,-9.628) 21.125,-12.125 20.25,-13 17.25,-13 15.25,-11 v1(15.25,-6.25) 15,-6 15,-2.25 ; v1(21.25,6.25) 20.04,6.25 18.633,4.842 ; v1@-20.168,1.169 -19.937,1.4 -18.475,1.4 ; -18.475,-4.975 -18.475,-4.475 ; -18.475,-4.475 -18.475,1.4 ; 15,-2.25 15,-1.75 ; 15,-1.75 15,0.392 15.059,0.451 15.059,1.309 15.369,1.619 v1(15.369,3.25) 15.678,2.941 16.731,2.941 18.633,4.842